# Altium PCB PCB1.PcbDoc
Units mil, origin at the board's own origin, x right, y up, seen from the top; angles counter-clockwise.
Board outline 3550 x 3775.2 mil, 4 copper layers (Top Layer, Internal Plane 1, Internal Plane 2, Bottom Layer), stack 53.034 mil thick; 6 components, 86 nets, 130 pads, 48 vias.
Unrouted connection lines stored in the file: 8.
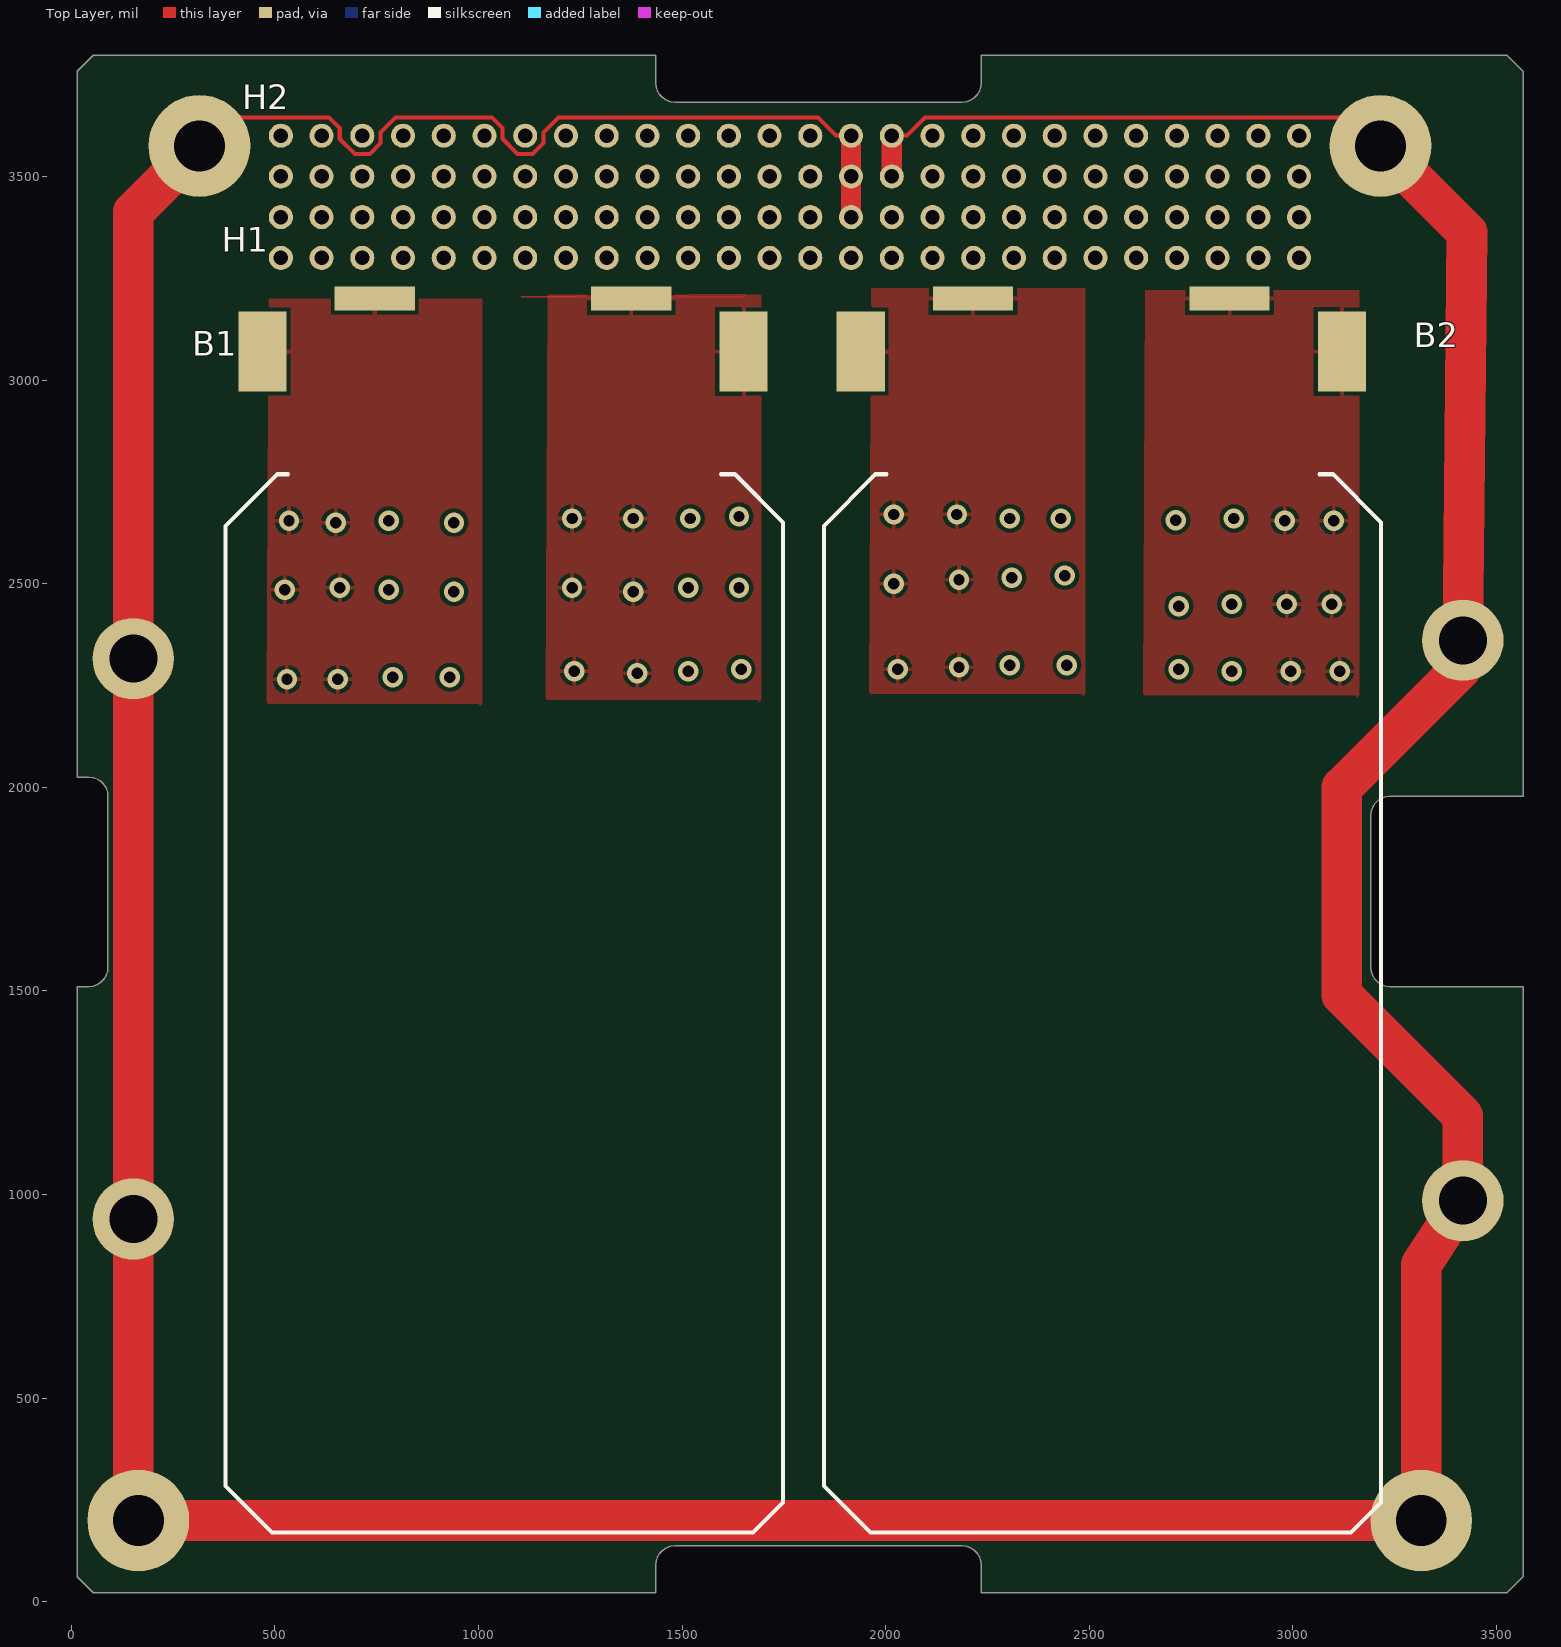
[diagram p0: Top Layer view]
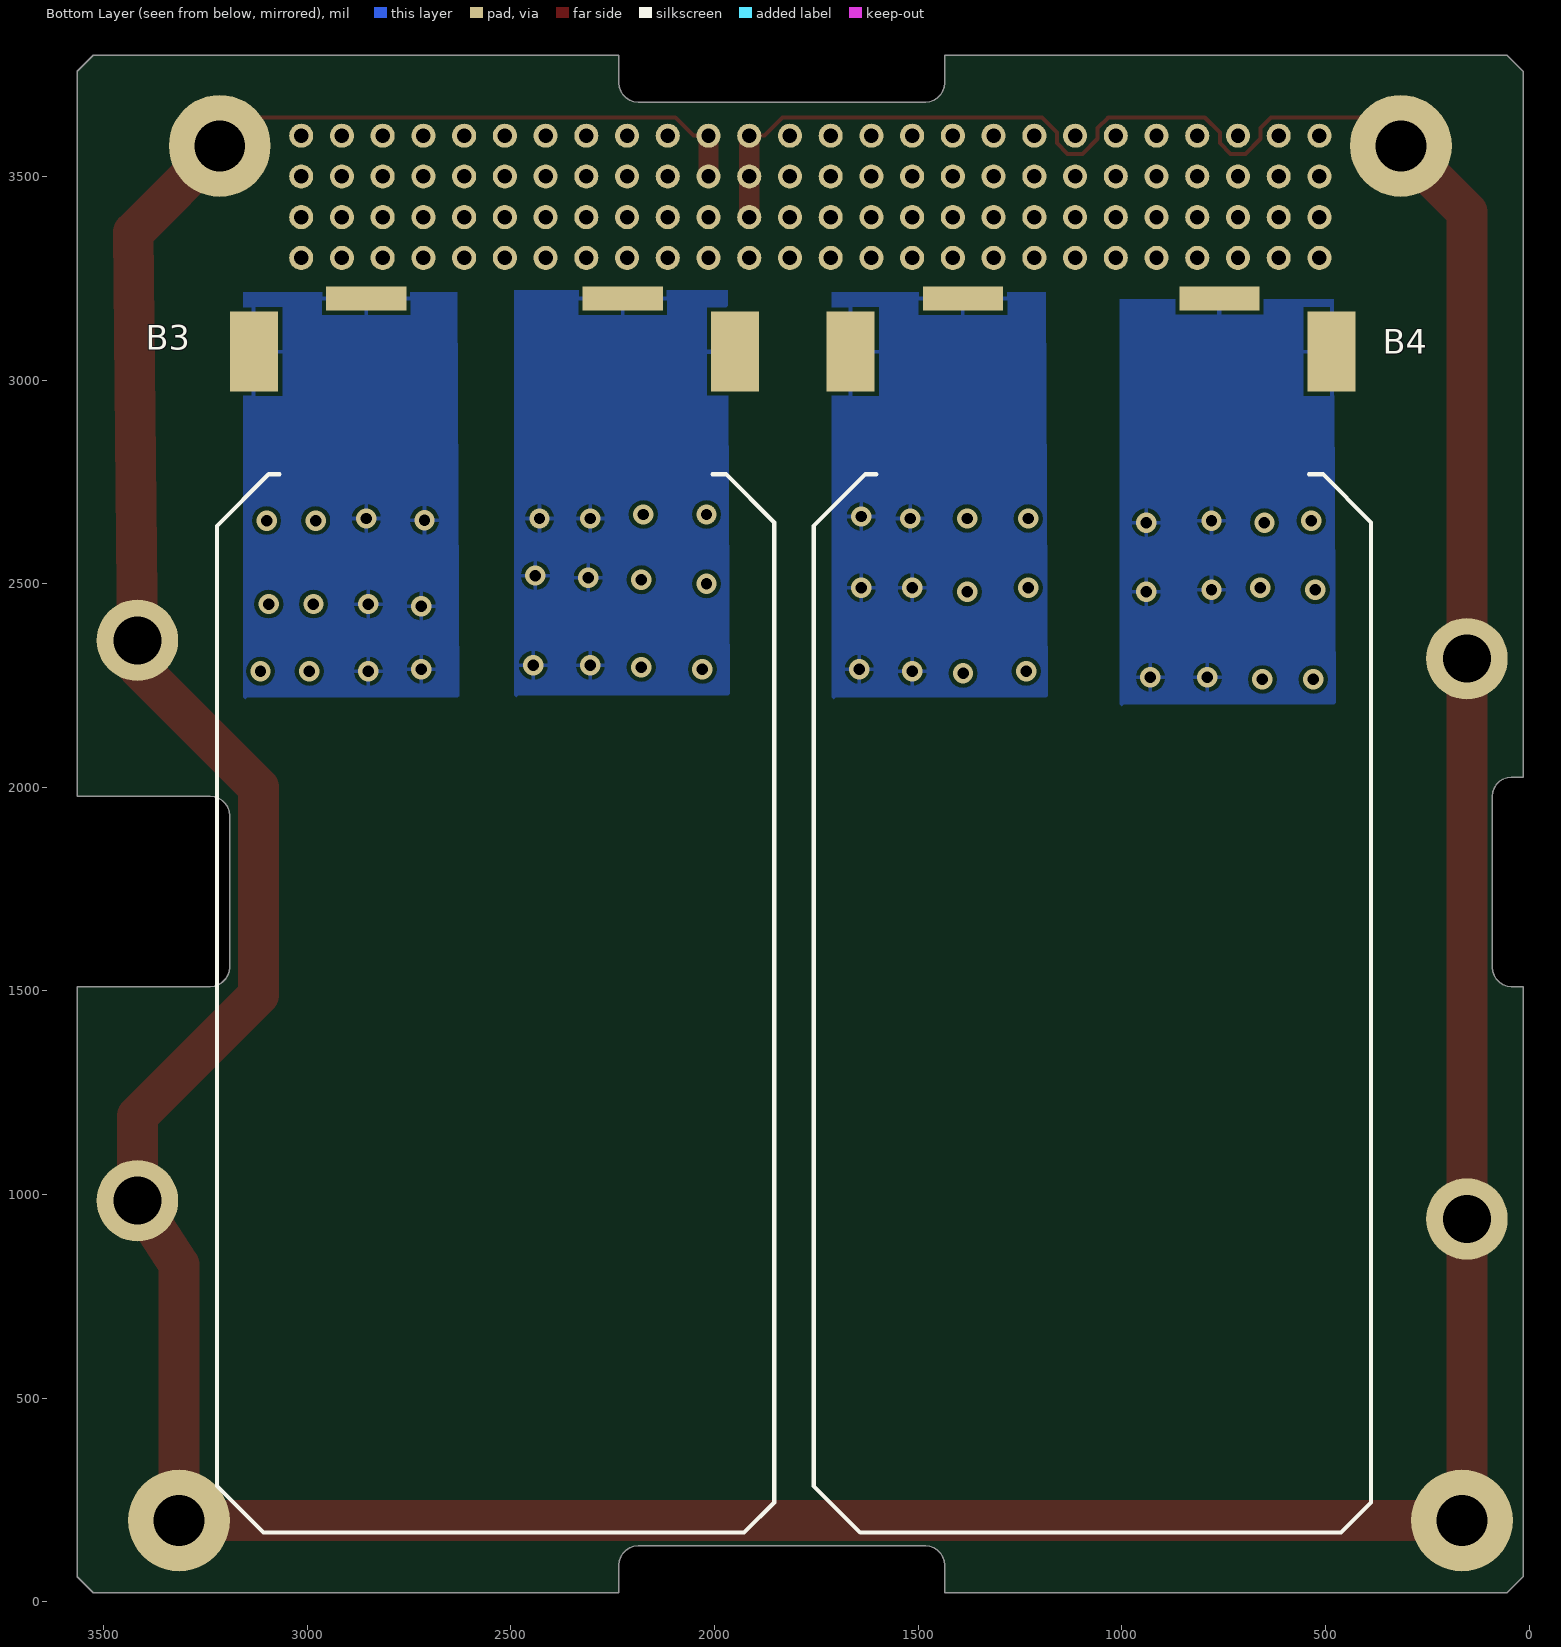
[diagram p1: Bottom Layer view, seen from below]
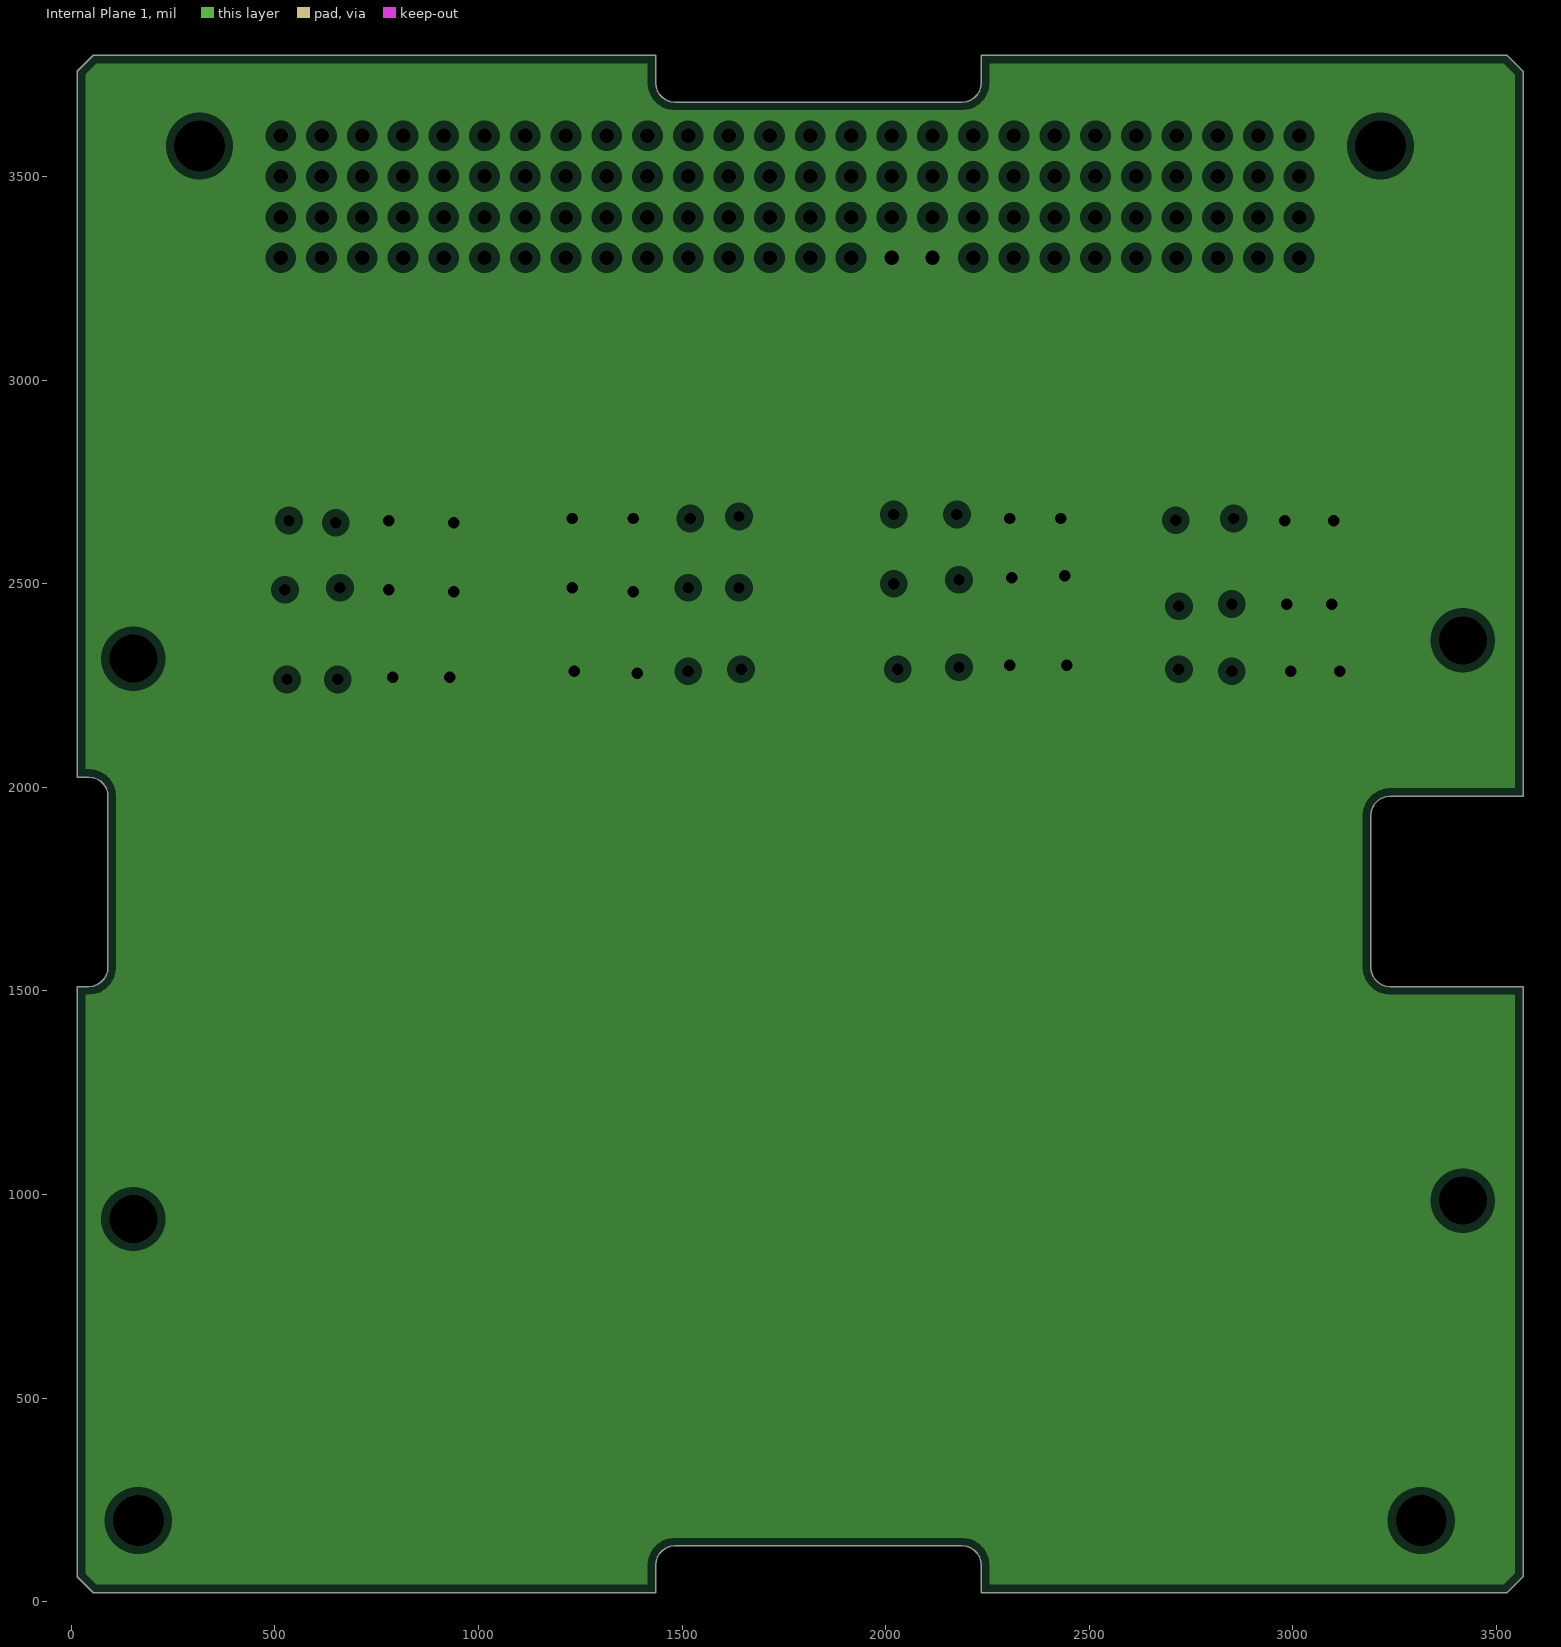
[diagram p2: Internal Plane 1, clearances drawn from the general rule]
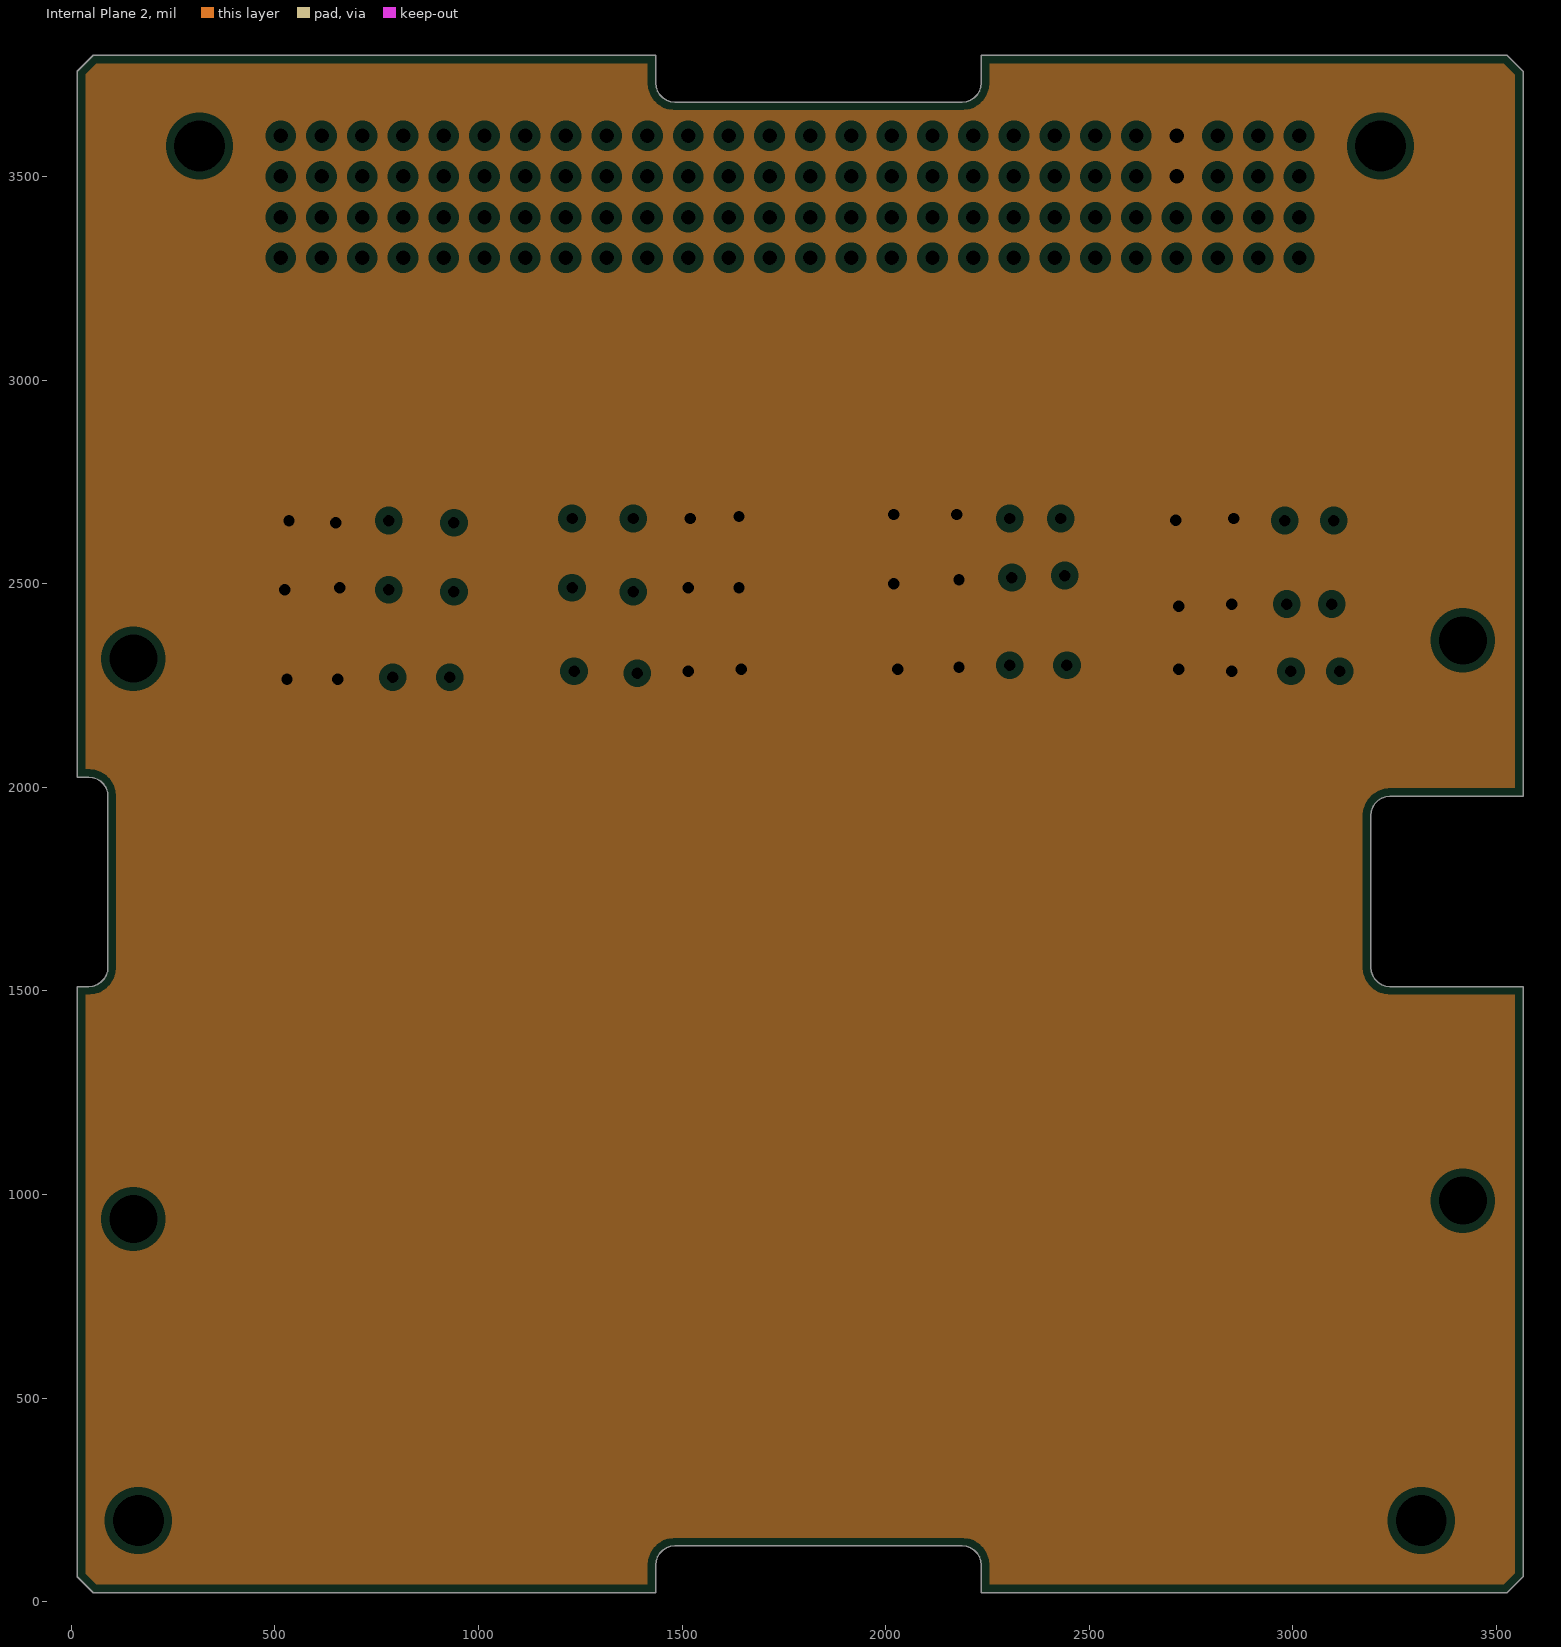
[diagram p3: Internal Plane 2, clearances drawn from the general rule]

## Layer stack, top to bottom
Top Solder: solder mask 0.4, Solder Resist, Dk 3.5
Top Layer: signal copper 1.4
Dielectric 1: core 18.7, FR-4, Dk 4.2
Internal Plane 1: plane copper 1.417, net VBAT-
Dielectric 3: core 10, Dk 4.2
Internal Plane 2: plane copper 1.417, net VIN
Dielectric 2: core 18.7, Dk 4.2
Bottom Layer: signal copper 1.4
Bottom Solder: solder mask 0.4, Solder Resist, Dk 3.5

## Board outline
3525.63,3797.6 2235.08,3797.6 2235.08,3729.88 2233.89,3719.37 2230.4,3709.38 2224.77,3700.43 2217.29,3692.95 2208.33,3687.32 2198.35,3683.82 2187.83,3682.64 1482.32,3682.64 1471.81,3683.82 1461.82,3687.32 1452.87,3692.95 1445.39,3700.43 1439.76,3709.38 1436.26,3719.37 1435.08,3729.88 1435.08,3797.6 54.37,3797.6 15,3758.23 15,2025.16 43.35,2025.16 53.86,2023.97 63.84,2020.48 72.8,2014.85 80.28,2007.37 85.91,1998.41 89.41,1988.43 90.59,1977.91 90.59,1558.23 89.41,1547.72 85.91,1537.73 80.28,1528.77 72.8,1521.29 63.84,1515.66 53.86,1512.17 43.35,1510.98 15,1510.98 15,61.77 54.37,22.4 1435.08,22.4 1435.08,90.12 1436.26,100.63 1439.76,110.62 1445.39,119.57 1452.87,127.06 1461.82,132.68 1471.81,136.18 1482.32,137.36 2187.83,137.36 2198.35,136.18 2208.33,132.68 2217.29,127.06 2224.77,119.57 2230.4,110.62 2233.89,100.63 2235.08,90.12 2235.08,22.4 3525.63,22.4 3565,61.77 3565,1510.98 3238.23,1510.98 3227.72,1512.17 3217.73,1515.66 3208.77,1521.29 3201.29,1528.77 3195.66,1537.73 3192.17,1547.72 3190.98,1558.23 3190.98,1930.67 3192.17,1941.18 3195.66,1951.17 3201.29,1960.13 3208.77,1967.61 3217.73,1973.23 3227.72,1976.73 3238.23,1977.91 3565,1977.91 3565,3758.23

## Design rules (kind name [scope] priority, off if disabled: settings)
Clearance [All] p1: gap=10
PlaneClearance [All] p1: clearance=20
PlaneConnect [All] p1: planeconnectstyle=Relief reliefexpansion=20 reliefentries=4 reliefconductorwidth=10 reliefairgap=10
PolygonConnect [All] p1: connectstyle=Relief reliefconductorwidth=10 reliefentries=4 polygonreliefangle="90 Angle" airgapwidth=10
RoutingVias [All] p1: holewidth=28 width=50 viastyle="Through Hole" minholewidth=28 minwidth=50 maxholewidth=28 maxwidth=50
SolderMaskExpansion [All] p1: expansion=4
Width [All] p1: maxlimit=10 minlimit=10 preferedwidth=10
27 further rules are at their usual default settings.

## Components (designator, comment, footprint, x,y, rotation, side; value= is the part's Value field where it differs from the comment)
B1 "Battery-Prot" Batt-Prot 1060.55,3168.43 r0 top
B2 "Battery-Prot" Batt-Prot 2529.45,3168.43 r0 top
B3 "Battery-Prot" Batt-Prot 2540.55,3168.43 r180 bottom
B4 "Battery-Prot" Batt-Prot 1075.55,3168.43 r180 bottom
H1 "H?" SAMTEC_ESQ_126_39_G_D 515,3300 r90 top
H2 "H?" SAMTEC_ESQ_126_39_G_D 515,3500 r90 top

## Footprints (in the part's own frame and the unit in brackets; to place one, negate y for a bottom-side part, rotate by r counter-clockwise, add the part's x,y. Pads: shape width x height; smd on the part's side, far side on the other; paste and mask are expansions set on the pad)
Batt-Prot [mm]
  rect 3x5 smd: EB+(-15,-2.5) EB-(15,-2.5)
  rect 5x1.5 smd: EB+(-8,0.8) EB-(8,0.8)
  silkscreen extent -17.3,-76.15 17.45,-10.15, body extent -17.43,-76.52 17.53,-0.1, height 8.97
SAMTEC_ESQ_126_39_G_D [mm]
  round 1.5 hole 0.9: 1(0,0) 2(2.54,0) 3(0,-2.54) 4(2.54,-2.54) 5(0,-5.08) 6(2.54,-5.08) 7(0,-7.62) 8(2.54,-7.62) 9(0,-10.16) 10(2.54,-10.16) 11(0,-12.7) 12(2.54,-12.7) 13(0,-15.24) 14(2.54,-15.24) 15(0,-17.78) 16(2.54,-17.78) 17(0,-20.32) 18(2.54,-20.32) 19(0,-22.86) 20(2.54,-22.86) 21(0,-25.4) 22(2.54,-25.4) 23(0,-27.94) 24(2.54,-27.94) 25(0,-30.48) 26(2.54,-30.48) 27(0,-33.02) 28(2.54,-33.02) 29(0,-35.56) 30(2.54,-35.56) 31(0,-38.1) 32(2.54,-38.1) 33(0,-40.64) 34(2.54,-40.64) 35(0,-43.18) 36(2.54,-43.18) 37(0,-45.72) 38(2.54,-45.72) 39(0,-48.26) 40(2.54,-48.26) 41(0,-50.8) 42(2.54,-50.8) 43(0,-53.34) 44(2.54,-53.34) 45(0,-55.88) 46(2.54,-55.88) 47(0,-58.42) 48(2.54,-58.42) 49(0,-60.96) 50(2.54,-60.96) 51(0,-63.5) 52(2.54,-63.5)
  body extent -1.27,-65.02 3.81,1.52, height 11.05

## Part data
H1 H2: library part SAMTEC_ESQ_126_39_G_D, "26X2 header"

## Free pads (board coordinates)
  round 200 hole 118.11: 1(152.8,940.12) 1(152.8,2316) 1(3417.2,985.12) 1(3417.2,2361)
  round 250 hole 125: 1(165,200) 1(315,3575) 1(3215,3575) 1(3315,200)
  round 19.68 on Drill Guide: 1(565,3297.6) 1(565,3497.6)

## Via types
v1: diameter 50, hole 28, Top Layer to Bottom Layer, 48 vias

## Nets (pads, with @x,y where several pads share a name; then routed paths per layer and width w, separated by ;. In a path a pad name is that pad's centre, name@x,y a point inside that pad or via, vN(x,y) a via of type N, cw(c..) or ccw(c..) an arc to the next point about the centre after c; other vN are vias at no path point)
1V: H1.34
5V: H2.25 H2.26
ACS3.3V: H1.27 H1.28
ACS_5V: H2.27 H2.28
"CTS MHX": H1.35
DIR-X: H2.12
DIR-Y: H2.11
DIR-Z: H2.9
"DSR MHX": H1.37
"DTR MHX": H1.38
FAULT: H1.25
GND: H1.2 H1.30 H2.29 H2.30 H2.31 H2.32 pad.1@152.8,940.12 pad.1@152.8,2316 pad.1@165,200 pad.1@315,3575 pad.1@3215,3575 pad.1@3315,200 pad.1@3417.2,985.12 pad.1@3417.2,2361 | length 13739.5
  Top Layer w10: pad.1@152.8,212.2 pad.1@165,200 ; pad.1@315,3575 384.53,3644.53 633.44,3644.53 659.53,3618.44 659.53,3592.5 696.56,3555.47 733.44,3555.47 759.53,3581.56 759.53,3607.5 796.56,3644.53 1033.44,3644.53 1059.53,3618.44 1059.53,3592.5 1096.56,3555.47 1133.44,3555.47 1159.53,3581.56 1159.53,3607.5 1196.56,3644.53 1833.44,3644.53 1877.97,3600 H2.30 ; H2.32 2052.03,3600 2096.56,3644.53 3145.47,3644.53 pad.1@3215,3575 ; pad.1@3417.2,2297.2 pad.1@3417.2,2361
  Top Layer w50: H1.30 H2.29 H2.30 ; H2.31 H2.32
  Top Layer w100: pad.1@152.8,212.2 152.8,940.12 152.8,2316 152.8,3412.8 pad.1@315,3575 ; pad.1@165,200 3315,200 3315,827.91 3417.2,985.12 3417.2,1192.8 3120,1490 3120,2000 pad.1@3417.2,2297.2 ; pad.1@3215,3575 3427.2,3362.8 pad.1@3417.2,2361
IO0: H1.24
IO1: H1.23
IO2: H1.22
IO3: H1.21
IO4: H1.20
IO5: H1.19
IO6: H1.18
IO7: H1.17
IO8: H1.16
IO9: H1.15
IO10: H1.14
IO11: H1.13
IO12: H1.12
IO13: H1.11
IO14: H1.10
IO15: H1.9
IO16: H1.8
IO17: H1.7
IO18: H1.6
IO19: H1.5
IO20: H1.4
IO21: H1.3
IO23: H1.1
IO24: H2.24
IO25: H2.23
IO26: H2.22
IO28: H2.20
IO29: H2.19
IO30: H2.18
IO31: H2.17
IO32: H2.16
IO33: H2.15
IO34: H2.14
IO35: H2.13
IO38: H2.10
IO40: H2.8
IO41: H2.7
IO42: H2.6
IO43: H2.5
IO44: H2.4
IO45: H2.3
IO46: H2.2
IO47: H2.1
PA0: H2.47
PA1: H2.48
PA2: H2.49
PA3: H2.50
PA22: H1.26
PA30: H1.40
PA31: H1.39
PB26: H1.36
PC11: H2.51
PC16: H2.52
PC17: H2.34
PC18: H2.33
PC19: H2.36
PC20: H2.35
PC21: H2.38
PC22: H2.37
PC23: H2.40
PC24: H2.39
PC25: H2.42
PC26: H2.41
PC27: H2.44
PC28: H2.43
RSVD0: H1.44
RSVD1: H1.45
RSVD2: H1.46
USER0: H1.47 H1.49 H1.51
USER1: H1.48 H1.50 H1.52
VBACKUP: H1.42
VBAT-: B1.EB- B2.EB- B3.EB- B4.EB- H1.31 H1.33
  other v1: 790,2270 930,2270 1390,2280 1235,2285 2995,2285 3115,2285 2305,2300 2445,2300 2985,2450 3095,2450 940,2480 1380,2480 780,2485 1230,2490 2310,2515 2440,2520 940,2650 780,2655 2979.64,2655 3100,2655 1230,2660 1380,2660 2305,2660 2430,2660
VIN: B1.EB+ B2.EB+ B3.EB+ B4.EB+ H2.45 H2.46
  other v1: 530,2265 655,2265 1515,2285 2850,2285 1645,2290 2030,2290 2720,2290 2180,2295 2720,2445 2850,2450 525,2485 660,2490 1515,2490 1640,2490 2020,2500 2180,2510 650,2650 535,2655 2712.35,2655.57 1520,2660 2855,2660 1640,2665 2020,2670 2175,2670
WKUP: H1.29
pads on no net: H1.32 H1.41 H1.43 H2.21

## Polygon pours and split planes (outlines as drawn)
VIN on Top Layer "Signal Layer 1- 3V3" (solid, pour order 17): 485,3200 1010,3200 1010,2205 1005,2200 1000,2205 480,2205
VBAT- on Top Layer "Signal Layer 1- 3V3" (solid, pour order 18): 1105,3205 1650,3205 1655,3210
VIN on Top Layer "Signal Layer 1- 3V3" (solid, pour order 16): 1965,3225 2490,3225 2490,2230 2485,2225 2480,2230 1960,2230
VBAT- on Top Layer "Signal Layer 1- 3V3" (solid, pour order 15): 1170,3210 1695,3210 1695,2215 1690,2210 1685,2215 1165,2215
VBAT- on Top Layer "Signal Layer 1- 3V3" (solid, pour order 14): 2637.49,3220.73 3162.49,3220.73 3162.49,2225.73 3157.49,2220.73 3152.49,2225.73 2632.49,2225.73
VIN on Bottom Layer "Signal Layer 1- 3V3" (solid, pour order 13): 2632.49,3215.73 3157.49,3215.73 3157.49,2220.73 3152.49,2215.73 3147.49,2220.73 2627.49,2220.73
VIN on Bottom Layer "Signal Layer 1- 3V3" (solid, pour order 12): 1187.49,3215.73 1712.49,3215.73 1712.49,2220.73 1707.49,2215.73 1702.49,2220.73 1182.49,2220.73
VBAT- on Bottom Layer "Signal Layer 1- 3V3" (solid, pour order 11): 1967.49,3220.73 2492.49,3220.73 2492.49,2225.73 2487.49,2220.73 2482.49,2225.73 1962.49,2225.73
VBAT- on Bottom Layer "Signal Layer 1- 3V3" (solid, pour order 10): 480.04,3198.76 1005.04,3198.76 1005.04,2203.76 1000.04,2198.76 995.04,2203.76 475.04,2203.76
VBAT- on Internal Plane 1 (split plane): 401 vertices, not listed, extent 35.1,42.5 3544.9,3777.5
VIN on Internal Plane 2 (split plane): 401 vertices, not listed, extent 35.1,42.5 3544.9,3777.5